# Altium PCB AMS_V3.PcbDoc
Units mm, origin at the board's own origin, x right, y up, seen from the top; angles counter-clockwise.
Board outline 87.6 x 94.8 mm, 2 copper layers (Top Layer, Bottom Layer), stack 1.58 mm thick; 71 components, 43 nets, 266 pads, 10 vias.
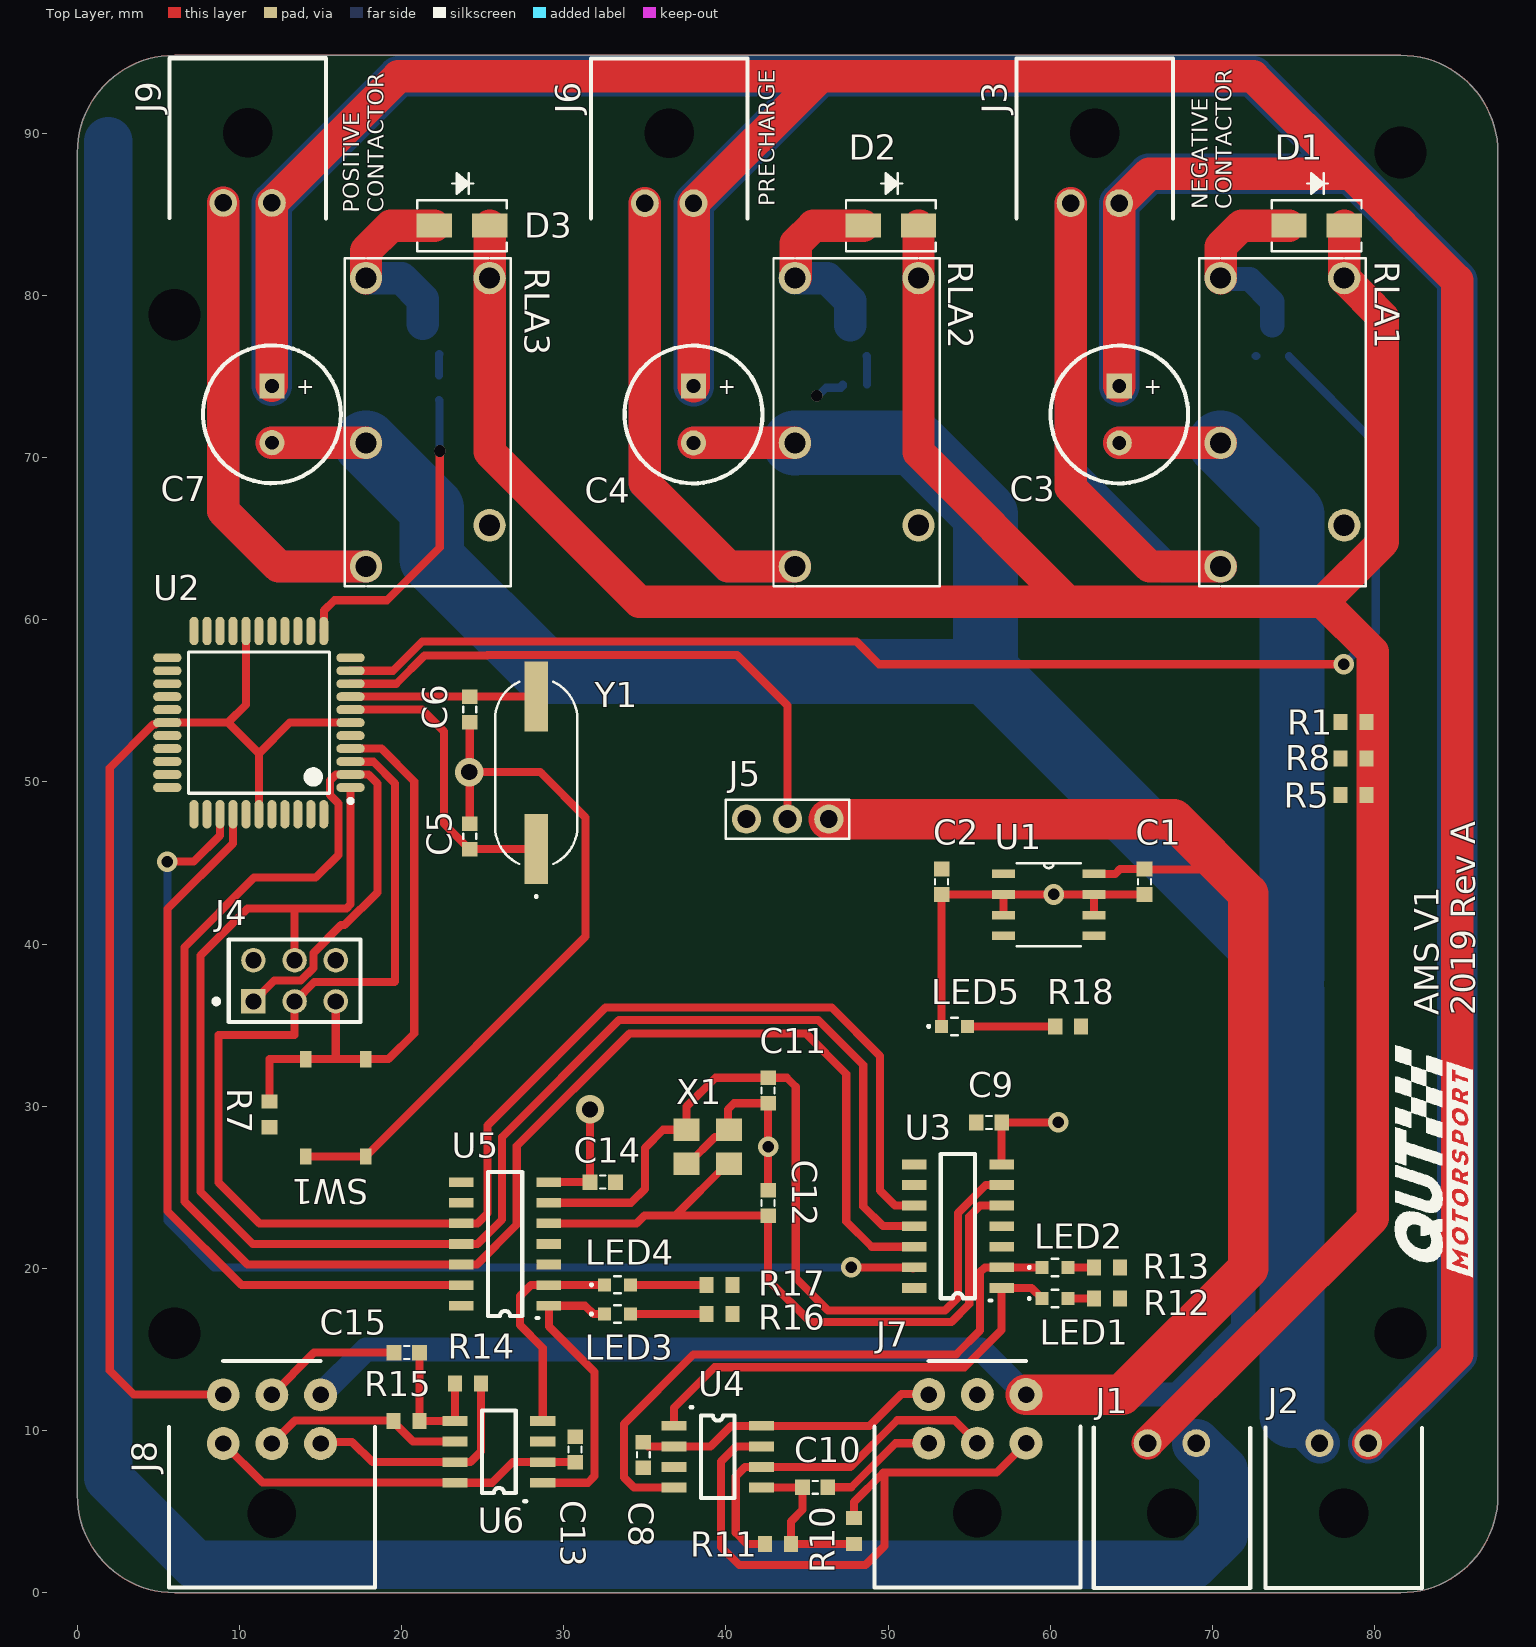
[diagram p0: Top Layer view]
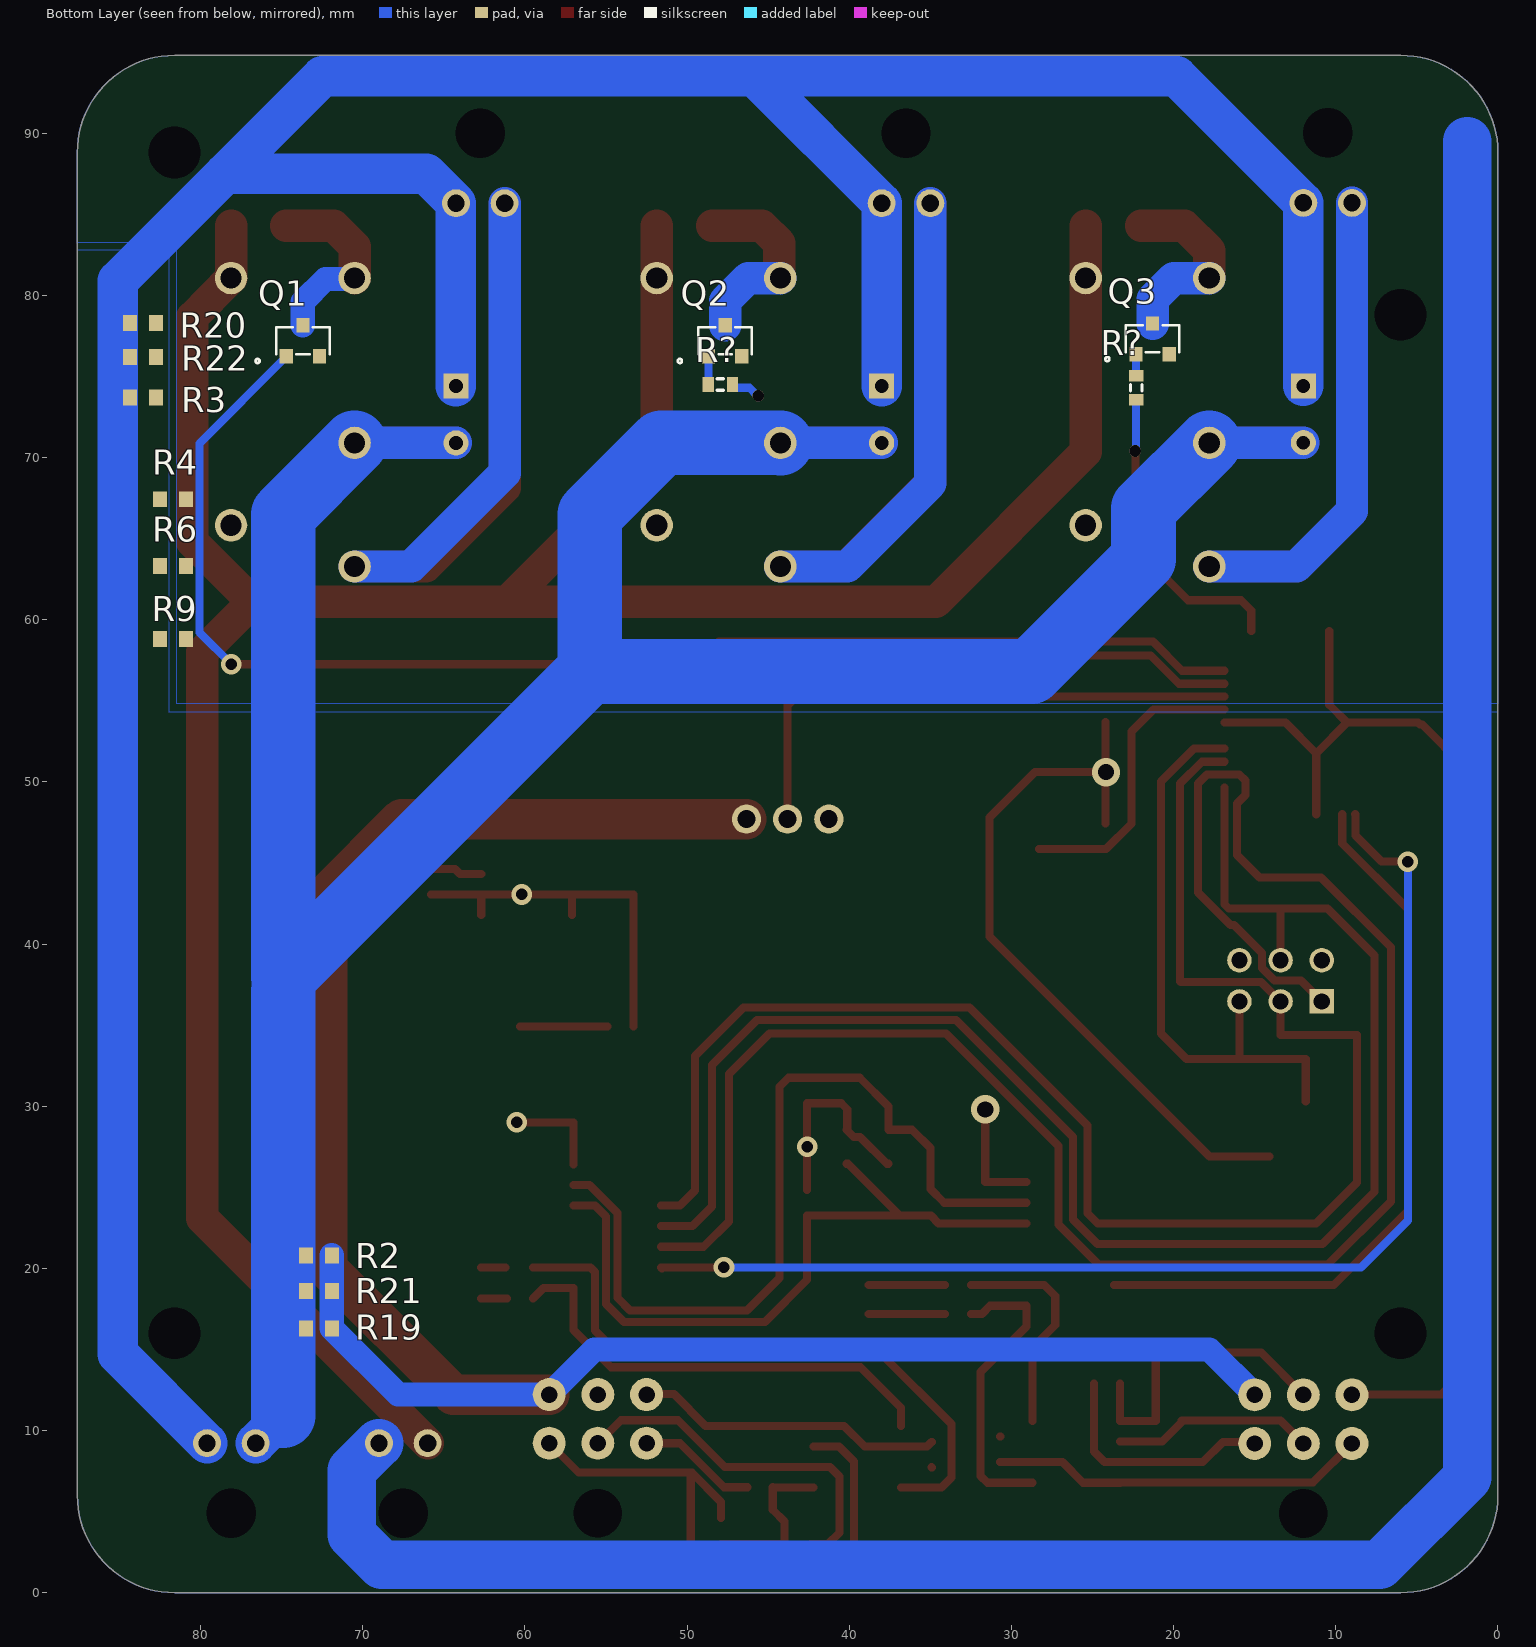
[diagram p1: Bottom Layer view, seen from below]

## Layer stack, top to bottom
Top Solder: solder mask 0.0102, Solder Resist, Dk 3.5
Top Layer: signal copper 0.035
Dielectric 1: dielectric 1.51, FR-4, Dk 4.8
Bottom Layer: signal copper 0.035
Bottom Solder: solder mask 0.0102, Solder Resist, Dk 3.5

## Board outline
0,6 0,88.8 cw(c6,88.8) 6,94.8 81.6,94.8 cw(c81.6,88.8) 87.6,88.8 87.6,6 cw(c81.6,6) 81.6,0 6,0 cw(c6,6)

## Design rules (kind name [scope] priority, off if disabled: settings)
Clearance [All] p1: gap=0.152 ignorepadtopadclearanceinfootprint=FALSE except(0: Arc-Hole Track-Hole SMDPad-Hole THPad-Hole Via-Hole Fill-Hole Poly-Hole Region-Hole Text-Hole)
HoleSize [All] p1: absolutevalues=TRUE maxlimit=5 minlimit=0.15 maxpercent=80.000 minpercent=20.000
HoleToHoleClearance [All] p1: gap=0.152 allowstackedmicrovias=TRUE
MinimumSolderMaskSliver [All] p1: minsoldermaskwidth=0.025
PlaneClearance [All] p1: clearance=0.5
PlaneConnect [All] p1: pad.planeconnectstyle=Direct pad.reliefexpansion=0.508 pad.reliefentries=4 pad.reliefconductorwidth=0.254 pad.reliefairgap=0.254 via.planeconnectstyle=Relief via.reliefexpansion=0.508 via.reliefentries=4 via.reliefconductorwidth=0.254 via.reliefairgap=0.254
PolygonConnect PolygonConnect_7 [All vs IsNamedPolygon('Bottom Layer-No Net')] p1: thpad.connectstyle=Relief thpad.reliefconductorwidth=0.254 thpad.reliefentries=4 thpad.polygonreliefangle="90 Angle" thpad.airgapwidth=0.254 smdpad.connectstyle=Direct smdpad.reliefconductorwidth=0.254 smdpad.reliefentries=4 smdpad.polygonreliefangle="90 Angle" smdpad.airgapwidth=0.254 via.connectstyle=Relief via.reliefconductorwidth=0.254 via.reliefentries=4 via.polygonreliefangle="90 Angle" via.airgapwidth=0.254
PolygonConnect PolygonConnect_6 [All vs IsNamedPolygon('Bottom Layer-No Net')] p2: thpad.connectstyle=Relief thpad.reliefconductorwidth=0.254 thpad.reliefentries=4 thpad.polygonreliefangle="90 Angle" thpad.airgapwidth=0.254 smdpad.connectstyle=Direct smdpad.reliefconductorwidth=0.254 smdpad.reliefentries=4 smdpad.polygonreliefangle="90 Angle" smdpad.airgapwidth=0.254 via.connectstyle=Relief via.reliefconductorwidth=0.254 via.reliefentries=4 via.polygonreliefangle="90 Angle" via.airgapwidth=0.254
PolygonConnect PolygonConnect_5 [All vs IsNamedPolygon('Bottom Layer-No Net')] p3: thpad.connectstyle=Relief thpad.reliefconductorwidth=0.254 thpad.reliefentries=4 thpad.polygonreliefangle="90 Angle" thpad.airgapwidth=0.254 smdpad.connectstyle=Direct smdpad.reliefconductorwidth=0.254 smdpad.reliefentries=4 smdpad.polygonreliefangle="90 Angle" smdpad.airgapwidth=0.254 via.connectstyle=Relief via.reliefconductorwidth=0.254 via.reliefentries=4 via.polygonreliefangle="90 Angle" via.airgapwidth=0.254
PolygonConnect PolygonConnect_4 [All vs IsNamedPolygon('Top Layer-No Net')] p4: thpad.connectstyle=Relief thpad.reliefconductorwidth=0.254 thpad.reliefentries=4 thpad.polygonreliefangle="90 Angle" thpad.airgapwidth=0.254 smdpad.connectstyle=Direct smdpad.reliefconductorwidth=0.254 smdpad.reliefentries=4 smdpad.polygonreliefangle="90 Angle" smdpad.airgapwidth=0.254 via.connectstyle=Relief via.reliefconductorwidth=0.254 via.reliefentries=4 via.polygonreliefangle="90 Angle" via.airgapwidth=0.254
PolygonConnect PolygonConnect_3 [All vs IsNamedPolygon('Top Layer--Safety')] p5: thpad.connectstyle=Relief thpad.reliefconductorwidth=0.254 thpad.reliefentries=4 thpad.polygonreliefangle="90 Angle" thpad.airgapwidth=0.254 smdpad.connectstyle=Direct smdpad.reliefconductorwidth=0.254 smdpad.reliefentries=4 smdpad.polygonreliefangle="90 Angle" smdpad.airgapwidth=0.254 via.connectstyle=Relief via.reliefconductorwidth=0.254 via.reliefentries=4 via.polygonreliefangle="90 Angle" via.airgapwidth=0.254
PolygonConnect PolygonConnect_2 [All vs IsNamedPolygon('Top Layer-+Safety')] p6: thpad.connectstyle=Relief thpad.reliefconductorwidth=0.254 thpad.reliefentries=4 thpad.polygonreliefangle="90 Angle" thpad.airgapwidth=0.254 smdpad.connectstyle=Direct smdpad.reliefconductorwidth=0.254 smdpad.reliefentries=4 smdpad.polygonreliefangle="90 Angle" smdpad.airgapwidth=0.254 via.connectstyle=Relief via.reliefconductorwidth=0.254 via.reliefentries=4 via.polygonreliefangle="90 Angle" via.airgapwidth=0.254
PolygonConnect PolygonConnect_1 [All vs IsNamedPolygon('Top Layer-+Safety')] p7: thpad.connectstyle=Relief thpad.reliefconductorwidth=0.254 thpad.reliefentries=4 thpad.polygonreliefangle="90 Angle" thpad.airgapwidth=0.254 smdpad.connectstyle=Direct smdpad.reliefconductorwidth=0.254 smdpad.reliefentries=4 smdpad.polygonreliefangle="90 Angle" smdpad.airgapwidth=0.254 via.connectstyle=Relief via.reliefconductorwidth=0.254 via.reliefentries=4 via.polygonreliefangle="90 Angle" via.airgapwidth=0.254
PolygonConnect [All] p8: connectstyle=Relief reliefconductorwidth=0.254 reliefentries=4 polygonreliefangle="90 Angle" airgapwidth=0.254
RoomDefinition AMS_V3 [InComponentClass('AMS_V3')] p1: confinementstyle=ConfineIn formatcopy=TRUE lockcomponents=FALSE outline 0,0 87.6,0 87.6,94.8 0,94.8
RoutingVias [All] p1: holewidth=0.711 width=0.3 viastyle="Through Hole" minholewidth=0.5 minwidth=0.15 maxholewidth=4 maxwidth=5
SilkToSolderMaskClearance [IsPad] p1: minsilkscreentomaskgap=0.075 clearancetoexposedcopper=TRUE
SolderMaskExpansion [All] p1: expansion=0.102
Width [All] p1: maxlimit=5 minlimit=0.152 preferedwidth=0.5 minimp=50.000000 maximp=50.000000 favimp=50.000000
24 further rules are at their usual default settings.

## Components (designator, comment, footprint, x,y, rotation, side; value= is the part's Value field where it differs from the comment)
C1 "0.33uF" *CAPC1608X95 65.8,43.839 r270 top
C2 "100nF" *CAPC1608X95 53.3,43.839 r270 top
C3 "ELECTROLYDIC" 8mm_THT 64.25,72.65 r270 top
C4 "ELECTROLYDIC" 8mm_THT 38,72.65 r270 top
C5 "16pF" *CAPC1608X95 24.2,46.637 r90 top
C6 "16pF" *CAPC1608X95 24.2,54.465 r270 top
C7 "ELECTROLYDIC" 8mm_THT 12,72.661 r270 top
C8 "100nF" *CAPC1608X95 34.9,8.5 r90 top
C9 "100nF" *CAPC1608X95 56.215,29 r0 top
C10 "4.7nF" *CAPC1608X95 45.5,6.5 r0 top
C11 "22pF" *CAPC1608X95 42.6,30.965 r270 top
C12 "22pF" *CAPC1608X95 42.6,24.035 r90 top
C13 "100nF" *CAPC1608X95 30.7,8.835 r270 top
C14 "100nF" *CAPC1608X95 32.4,25.315 r180 top
C15 "4.7nF" *CAPC1608X95 20.315,14.8 r180 top
D1 "VS-10MQ100HM35AT" DIODE_SMA 76.418,84.3 r180 top value=Value
D2 "VS-10MQ100HM35AT" DIODE_SMA 50.168,84.3 r180 top value=Value
D3 "VS-10MQ100HM35AT" DIODE_SMA 23.718,84.3 r180 top value=Value
J1 "Microfit 3.0 1x2" Microfit_1X2_R_TH 67.5,4.9 r0 top
J2 "Microfit 3.0 1x2" Microfit_1X2_R_TH 78.1,4.9 r0 top
J3 "Microfit 3.0 1x2" Microfit_1X2_R_TH 62.75,90 r180 top
J4 "826634-3" TE_826634-3 10.86,36.46 r0 top
J5 "1x3" 1x3 46.34,47.7 r180 top
J6 "Microfit 3.0 1x2" Microfit_1X2_R_TH 36.5,90 r180 top
J7 "Microfit 3.0 2x3" Microfit_2X3_R_TH 55.5,4.9 r0 top
J8 "Microfit 3.0 2x3" Microfit_2X3_R_TH 12,4.882 r0 top
J9 "Microfit 3.0 1x2" Microfit_1X2_R_TH 10.5,90.02 r180 top
LED1 "LTST-C191TGKT" LED_LTW-C193TS00 60.3,18.14 r0 top value=Value
LED2 "LTST-C191TGKT" LED_LTW-C193TS00 60.3,20.06 r0 top value=Value
LED3 "LTST-C191TGKT" LED_LTW-C193TS00 33.3,17.185 r0 top value=Value
LED4 "LTST-C191TGKT" LED_LTW-C193TS00 33.3,18.985 r0 top value=Value
LED5 "LTST-C191TGKT" LED_LTW-C193TS00 54.1,34.919 r0 top value=Value
Q1 "MMBT2222A-7-F" SOT-23 73.691,77.2 r180 bottom value=Value
Q2 "MMBT2222A-7-F" SOT-23 47.65,77.2 r180 bottom value=Value
Q3 "MMBT2222A-7-F" SOT-23 21.291,77.315 r180 bottom value=Value
R1 "0R0" RESC1608X55N 78.7,53.7 r0 top
R2 "0R0" RESC1608X55N 72.7,20.8 r0 bottom
R3 "0R0" RESC1608X55N 83.55,73.7 r180 bottom
R4 "0R0" RESC1608X55N 81.7,67.422 r180 bottom
R5 "0R0" RESC1608X55N 78.7,49.2 r0 top
R6 "0R0" RESC1608X55N 81.7,63.3 r180 bottom
R7 "10K" RESC1608X55N 11.852,29.5 r270 top
R8 "0R0" RESC1608X55N 78.7,51.45 r0 top
R9 "0R0" RESC1608X55N 81.7,58.8 r180 bottom
R10 "60R4" RESC1608X55N 47.9,3.8 r90 top
R11 "60R4" RESC1608X55N 43.2,3 r180 top
R12 "330R" RESC1608X55N 63.5,18.14 r180 top
R13 "330R" RESC1608X55N 63.5,20.06 r180 top
R14 "60R4" RESC1608X55N 24.1,12.9 r0 top
R15 "60R4" RESC1608X55N 20.3,10.59 r180 top
R16 "330R" RESC1608X55N 39.6,17.185 r180 top
R17 "330R" RESC1608X55N 39.6,18.975 r180 top
R18 "330R" RESC1608X55N 61.1,34.919 r180 top
R19 "0R0" RESC1608X55N 72.7,16.3 r0 bottom
R20 "0R0" RESC1608X55N 83.55,78.3 r180 bottom
R21 "0R0" RESC1608X55N 72.7,18.6 r0 bottom
R22 "0R0" RESC1608X55N 83.55,76.2 r180 bottom
R? "Res3" J1-0603 47.95,74.5 r0 bottom value=1K
R? "Res3" J1-0603 22.3,74.3 r90 bottom value=1K
RLA1 "ALQ305" ALQ105 78.12,63.28 r0 top value=Value
RLA2 "ALQ305" ALQ105 51.87,63.28 r0 top value=Value
RLA3 "ALQ305" ALQ105 25.42,63.28 r0 top value=Value
SW1 "PTS526 SM15 SMTR2 LFS" PTS526SK15SMTR2LFS 15.94,29.9 r270 top
U1 "L78L05ACD13TR" SOIC127P600X175-8N 59.9,42.419 r0 top
U2 "ATmega1284P-AU" 44A_N 11.2,53.65 r180 top
U3 "MCP2517FD" "MCP2517FD SOIC" 57,18.79 r180 top
U4 "MCP2561" "MCP2561 SOIC" 36.798,10.29 r0 top
U5 "MCP2517FD" "MCP2517FD SOIC" 29.075,17.695 r180 top
U6 "MCP2561" "MCP2561 SOIC" 28.7,6.78 r180 top
X1 "ABM8G-20.000MHZ-18-D2Y-T" "XTAL 3.2x2.5mm" 38.875,27.5 r180 top
Y1 "28MHZ" ABLS_Series 28.3,50.551 r90 top value=Value

## Footprints (in the part's own frame and the unit in brackets; to place one, negate y for a bottom-side part, rotate by r counter-clockwise, add the part's x,y. Pads: shape width x height; smd on the part's side, far side on the other; paste and mask are expansions set on the pad)
1x3 [mm]
  round 1.8 hole 1.1 mask+0: 1(0,0) 2(2.54,0) 3(5.08,0)
  silkscreen extent -1.27,-1.2 6.35,1.2, body extent -1.27,-1.2 6.35,1.2, height 8.38
8mm_THT [mm]
  rect 1.55x1.55 hole 0.85: 1(-1.75,0)
  round 1.55 hole 0.85: 2(1.75,0)
  silkscreen extent -4.25,-4.25 4.25,4.25, body extent -4,-4 4,4, height 11.5
44A_N [mm] "Thin QFP, 44-Leads, Body 10x10mm, Pitch 0.8mm, IPC Medium Density"
  oval 1.75x0.55 smd: 1(-5.65,4) 2(-5.65,3.2) 3(-5.65,2.4) 4(-5.65,1.6) 5(-5.65,0.8) 6(-5.65,0) 7(-5.65,-0.8) 8(-5.65,-1.6) 9(-5.65,-2.4) 10(-5.65,-3.2) 11(-5.65,-4) 23(5.65,-4) 24(5.65,-3.2) 25(5.65,-2.4) 26(5.65,-1.6) 27(5.65,-0.8) 28(5.65,0) 29(5.65,0.8) 30(5.65,1.6) 31(5.65,2.4) 32(5.65,3.2) 33(5.65,4)
  oval 0.55x1.75 smd: 12(-4,-5.65) 13(-3.2,-5.65) 14(-2.4,-5.65) 15(-1.6,-5.65) 16(-0.8,-5.65) 17(0,-5.65) 18(0.8,-5.65) 19(1.6,-5.65) 20(2.4,-5.65) 21(3.2,-5.65) 22(4,-5.65) 34(4,5.65) 35(3.2,5.65) 36(2.4,5.65) 37(1.6,5.65) 38(0.8,5.65) 39(0,5.65) 40(-0.8,5.65) 41(-1.6,5.65) 42(-2.4,5.65) 43(-3.2,5.65) 44(-4,5.65)
  silkscreen extent -5.77,-4.35 4.35,4.95, body extent -5,-5 5,5, height 1.2
*CAPC1608X95 [mm]
  rect 0.9x0.97 smd: 1(-0.785,0) 2(0.785,0)
  silkscreen extent -0.18,-0.4 0.18,0.4, body extent -0.8,-0.4 0.8,0.4, height 0.8
ABLS_Series [mil]
  rect 170x56 smd paste+0 mask+0: 1(-185,0) 2(185,0)
  silkscreen extent -303,-100 221,100, body extent -225,-100 225,100, height 165
ALQ105 [mm]
  round 2 hole 1.3 mask+0: 1(-7.62,17.78) 2(0,17.78) 3(-7.62,7.62) 4(-7.62,0) 5(0,2.54)
  silkscreen extent -8.94,-1.23 1.32,19.01, body extent -8.81,-1.1 1.19,18.88, height 15.6
DIODE_SMA [mil]
  rect 86x58 smd paste+0 mask+0: 1(-67,0) 2(67,0)
  silkscreen extent -109,-127 109,62, body extent -89,-55 89,55, height 90
J1-0603 [mm] "Chip Resistor, Body 1.6x0.8mm, IPC High Density"
  rect 0.7x0.9 smd: 1(-0.75,0) 2(0.75,0)
  silkscreen extent -0.2,-0.35 0.2,0.35, body extent -0.85,-0.48 0.85,0.48, height 0.9
LED_LTW-C193TS00 [mm]
  rect 0.8x0.8 smd paste+0 mask+0: 1(-0.8,0) 2(0.8,0)
  silkscreen extent -1.68,-0.53 0.2,0.53, body extent -0.85,-0.45 0.85,0.45, height 0.8
"MCP2517FD SOIC" [mm]
  rect 1.5x0.6 smd: 1(0,0) 2(0,-1.27) 3(0,-2.54) 4(0,-3.81) 5(0,-5.08) 6(0,-6.35) 7(0,-7.62) 8(5.4,-7.62) 9(5.4,-6.35) 10(5.4,-5.08) 11(5.4,-3.81) 12(5.4,-2.54) 13(5.4,-1.27) 14(5.4,0)
  silkscreen extent 0.63,-8.26 3.76,0.76, body extent 0.74,-8.13 4.64,0.52, height 1.74
"MCP2561 SOIC" [mm]
  rect 1.55x0.6 smd: 1(0,0) 2(0,-1.27) 3(0,-2.54) 4(0,-3.81) 5(5.4,-3.81) 6(5.4,-2.54) 7(5.4,-1.27) 8(5.4,0)
  silkscreen extent 1.02,-4.44 3.74,1.14, body extent 0.51,-4.38 4.64,0.52, height 1.65
Microfit_1X2_R_TH [mm]
  round 1.72 hole 1.07: 1(1.5,4.32) 2(-1.5,4.32)
  round 1.524 hole 3.05: ""(0,0)
  silkscreen extent -4.82,-4.6 4.82,5.28, body extent -4.82,-4.6 4.83,5.3, height 5.64
Microfit_2X3_R_TH [mil]
  round 80 hole 40: 1(118.11,170) 2(0,170) 3(-118.11,170) 4(118.11,288.19) 5(0,288.19) 6(-118.11,288.19)
  round 0 hole 118.11 mask+10: NC(0,0)
  silkscreen extent -250,-180 250,370, body extent -259,-181 259,301, height 348
PTS526SK15SMTR2LFS [mm]
  rect 1x0.7 smd: 1(-3,1.85) 2(3,1.85) 3(-3,-1.85) 4(3,-1.85)
  body extent -3.2,-2.55 3.2,2.55, height 1.5
RESC1608X55N [mm]
  rect 0.87x0.98 smd: 1(-0.8,0) 2(0.8,0)
  body extent -0.8,-0.4 0.8,0.4, height 0.45
SOIC127P600X175-8N [mil]
  rect 56x21 smd: 1(-110,75) 2(-110,25) 3(-110,-25) 4(-110,-75) 5(110,-75) 6(110,-25) 7(110,25) 8(110,75)
  silkscreen extent -78,-101 78,101, body extent -77,-96 77,96, height 69
SOT-23 [mil]
  rect 32x35 smd paste+0 mask+0: 1(-40.35,-37.2) 2(40.35,-37.2) 3(0,37.2)
  silkscreen extent -115,-54 65,33, body extent -60,-28 60,28, height 43
TE_826634-3 [mm]
  rect 1.508x1.508 hole 1: 1(0,0)
  round 1.508 hole 1: 2(0,2.54) 3(2.54,0) 4(2.54,2.54) 5(5.08,0) 6(5.08,2.54)
  silkscreen extent -2.44,-1.27 6.6,3.81, body extent -1.52,-1.27 6.6,3.81, height 8
"XTAL 3.2x2.5mm" [mm]
  rect 1.6x1.4 smd: 1(-1.3,-1.05) 2(1.3,-1.05) 3(1.3,1.05) 4(-1.3,1.05)
  body extent -1.6,-1.25 1.6,1.25, height 1

## Part data
C1 C2 C5 C6 C8 C9 C10 C11 C12 C13 C14 C15: library part CGJ3E3X7R1E334K080AB, "Cap Ceramic 0.33uF 25V X7R 10% SMD 0603 125°C Punched Paper T/R", Package="0603 TDK", Digi-Key_Part_Number=445-13347-1-ND, Digi-Key_Purchase_URL=https://www.digikey.com.au/product-detail/en/tdk-corporation/CGJ3E3X7R1E334K080AB/445-13347-1-ND/3955013?utm_source=snapeda&utm_medium=aggregator&utm_campaign=symbol, MF=TDK, MP=CGJ3E3X7R1E334K080AB, SnapEDA_Link=https://www.snapeda.com/parts/CGJ3E3X7R1E334K080AB/TDK-Lambda%20Americas%20Inc/view-part/?ref=snap
D1 D2 D3: "No Description Available", Manufacturer_Part_Number=VS-10MQ100NPBF, Built_By=EMA_UL_Team, Copyright="Copyright (C) 2018 Accelerated Designs. All rights reserved", RefDes=RefDes, Type=DEV, Vendor=Vishay
J1 J2 J3 J6 J9: library part Microfit_1x2
J4: "Conn Unshrouded Header HDR 6 POS 2.54mm Solder RA Thru-Hole Automotive Carton", Package=None, Availability=Unavailable, EU_RoHS_Compliance=Compliant, MF="TE Connectivity", MP=826634-3, Price=None, SnapEDA_Link=https://www.snapeda.com/parts/826634-3/TE%20Connectivity%20AMP%20Connectors/view-part/?ref=snap, TE_purchase_URL=https://www.te.com/usa-en/product-826634-3.html?te_bu=Cor&te_type=disp&te_campaign=seda_glo_cor-seda-global-disp-prtnr-fy19-seda-model-bom-cta_sma-317_1&elqCampaignId=32493
J7 J8: library part Microfit_2x3
LED1 LED2 LED3 LED4 LED5 Q1 Q2 Q3 RLA1 RLA2 RLA3: "No Description Available", RefDes=RefDes, Type=DEV
  LED1 LED2 LED3 LED4 LED5: Built_By=EMA_Justin, Copyright="Copyright (C) 2016 Accelerated Designs. All rights reserved", Manufacturer_Part_Number=LTST-C191TGKT, Vendor=Lite-On
  Q1 Q2 Q3: Built_By=EMA_UL_Team, Copyright="Copyright (C) 2018 Accelerated Designs. All rights reserved", Manufacturer_Part_Number=MMBT2222A-7-F, Vendor="Diodes Inc"
  RLA1 RLA2 RLA3: Built_By=EMA_UL_Team, Copyright="Copyright (C) 2018 Accelerated Designs. All rights reserved", Manufacturer_Part_Number=ALQ305, Vendor=Panasonic
R1 R2 R3 R4 R5 R6 R8 R9 R10 R11 R12 R13 R14 R15 R16 R17 R18 R19 R20 R21 R22: library part 10K, "Res Thick Film 0603 10K Ohm 5% 0.25W_1/4W_ ±200ppm/C Molded SMD Automotive T/R", Package="0603 Rohm", Availability=Unavailable, MF=Rohm, MP=ESR03EZPJ103, Price=None, SnapEDA_Link=https://www.snapeda.com/parts/ESR03EZPJ103/Rohm/view-part/?ref=snap
R7: "Res Thick Film 0603 10K Ohm 5% 0.25W_1/4W_ ±200ppm/C Molded SMD Automotive T/R", Package="0603 Rohm", Availability=Unavailable, MF=Rohm, MP=ESR03EZPJ103, Price=None, SnapEDA_Link=https://www.snapeda.com/parts/ESR03EZPJ103/Rohm/view-part/?ref=snap
R? R?: "Resistor", LatestRevisionDate=29-May-2009, LatestRevisionNote="IPC-7351 Footprint Added.", PackageDescription="Chip Resistor", PackageReference=J1-0603, Published=8-Jun-2000, Publisher="Altium Limited"
SW1: "TACT 5.2 X 5.2, 1.5 MM H, 160GF, / SPST-NO Top Actuated Surface Mount"
U1: "L78L Series 20 V 100 mA Surface Mount Positive Voltage Regulator - SOIC-8", Package="SOIC-8 STMicroelectronics", Availability=Unavailable, MF=STMicroelectronics, MP=L78L05ACD13TR, Price=None, SnapEDA_Link=https://www.snapeda.com/parts/L78L05ACD13TR/STMicroelectronics/view-part/?ref=snap
U2: library part CMP-0107-00053-1, "20 MHz 8-bit AVR Microcontroller with 128KB Flash, 44-Pin TQFP Pkg, Industrial Temp", DatasheetVersion="revD, Nov-2009", PackageDescription="44-Pin Plastic Thin Profile Quad Flat Pack, 10 x 10 x 1.0 mm Body, 0.8 mm Pitch (TQFP)", PackageReference=44A, PackageVersion="rev.B, Oct-2001"
X1: library part "Crystal 20Mhz 3.2x2.5mm", "20MHz ±20ppm Crystal 18pF 80 Ohms 4-SMD, No Lead", ComponentLink1Description=Digikey, ComponentLink1URL=https://www.digikey.com.au/product-detail/en/abracon-llc/ABM8G-20.000MHZ-18-D2Y-T/535-10271-1-ND/2218084, ComponentLink2Description=Datasheet, ComponentLink2URL=https://abracon.com/Resonators/ABM8G.pdf, ComponentLink3Description=Drawing, ComponentLink3URL=https://abracon.com/Support/PackageDrawing/Resonators/ABM8G.PDF
Y1: library part ABLS-28.63636MHZ, "No Description Available", Manufacturer_Part_Number=ABLS-28.63636MHZ-CL-RESR-A-1-G-F, Built_By=EMA_UL_Team, Copyright="Copyright (C) 2018 Accelerated Designs. All rights reserved", RefDes=RefDes, Type=DEV, Vendor=Abracon

## Free pads (board coordinates)
  round 3 hole 3.2 unplated: 2(81.6,88.8) 3(6,78.8) 5(6,16) 6(81.6,16)

## Via types
v1: diameter 1.27, hole 0.711, Top Layer to Bottom Layer, 6 vias
v2: diameter 0.711, hole 0.711, Top Layer to Bottom Layer, 2 vias
v3: diameter 1.75, hole 1, Top Layer to Bottom Layer, 2 vias

## Nets (pads, with @x,y where several pads share a name; then routed paths per layer and width w, separated by ;. In a path a pad name is that pad's centre, name@x,y a point inside that pad or via, vN(x,y) a via of type N, cw(c..) or ccw(c..) an arc to the next point about the centre after c; other vN are vias at no path point)
+5V: C2.1 C8.1 C9.1 C13.1 C14.1 J4.2 R1.1 R5.1 R7.2 R8.1 R12.1 R13.1 R16.1 R17.1 R18.1 U1.1 U2.5 U2.17 U2.38 U3.14 U4.3 U5.14 U6.3 | length 0.1
  Top Layer w0.5: C13.1@30.665,9.62 C13.1 ; C8.1 C8.1@34.917,7.733
+12V: C1.1 J5.1 J7.4 J8.4 R2.1 R19.1 R21.1 U1.8 | length 141.3
  Top Layer w0.5: U1.8 64,44.324 64.3,44.624 C1.1 65.824,44.6 70.647,44.6
  Top Layer w2.5: J5.1 67.6,47.7 72.2,43.1 72.2,20 64.42,12.22 J7.4
  Bottom Layer w1.5: J8.4 17.798,15 55.72,15 J7.4 67.82,12.22 R19.1 R21.1 R2.1
+Safety: C3.2 C4.2 C7.2 J2.2 R2.2 R19.2 R21.2 RLA1.3 RLA2.3 RLA3.3 | length 195.7
  Top Layer w2: C7.2@12,70.9 RLA3.3 ; C4.2 RLA2.3 ; C3.2 RLA1.3
  Bottom Layer w2: C7.2@12,70.9 RLA3.3 ; C4.2 RLA2.3 ; C3.2 RLA1.3
  Bottom Layer w2.5: 74.9,10.92 J2.2
  Bottom Layer w4: RLA3.3 21.852,66.848 21.852,63.748 28.8,56.8 56,56.8 ; RLA2.3 44.259,70.909 51.591,70.909 56,66.5 56,56.873 74.9,37.973 74.9,66.5 RLA1.3 ; 74.9,10.92 74.9,37.1
-Safety: C3.1 C4.1 C7.1 J2.1 J3.2 J6.2 J9.2 R3.1 R20.1 R22.1 | length 430.7
  Top Layer w2: C7.1 J9.2 19.8,93.5 45.82,93.5 ; C4.1 J6.2 45.82,93.5 ; C3.1 J3.2 64.28,85.68 66.1,87.5 78.5,87.5 ; J2.1 85.08,14.7 85.08,80.92 78.5,87.5 ; 45.82,93.5 72.5,93.5 78.5,87.5
  Bottom Layer w2.5: C7.1 J9.2 19.8,93.5 45.72,93.5 72.5,93.5 78.5,87.5 ; C4.1 J6.2 45.72,93.4 ; C3.1 J3.2 64.256,85.68 66.076,87.5 78.5,87.5 ; J2.1 85.1,14.72 85.1,73.6 85.1,76 85.1,78.4 85.1,80.9 78.5,87.5
CAN_OSC1: C11.1 U3.6 U5.6 X1.2 | length 52.6
  Top Layer w0.5: U5.6 34.145,24.045 35,24.9 35,27.427 36.123,28.55 X1.2 37.575,29.975 39.35,31.75 C11.1 43.75,31.75 44.3,31.2 44.3,19.4 46.3,17.4 53.51,17.4 54.3,18.19 54.3,23.423 56.017,25.14 U3.6
CAN_OSC2: C12.1 U3.5 U5.5 X1.4 | length 43.9
  Top Layer w0.5: U5.5 34.492,22.775 34.967,23.25 C12.1 42.6,19.3 45.2,16.7 53.9,16.7 55,17.8 55,23.2 55.67,23.87 U3.5 ; 36.888,23.262 40.075,26.45 X1.4
FanControl: J5.2 U2.9 | length 36
  Top Layer w0.5: U2.9 19.669,56.05 21.407,57.788 25.281,57.788 25.304,57.811 40.689,57.811 43.8,54.7 J5.2
GLV_12V: D1.1 D2.1 D3.1 J1.2 R1.2 R5.2 R8.2 RLA1.2 RLA2.2 RLA3.2 | length 181.2
  Top Layer w2: D3.1 RLA3.2 25.42,70.343 34.663,61.1 61.1,61.1 ; D2.1 RLA2.2 51.87,70.33 61.1,61.1 ; J1.2 79.887,23.087 ; D1.1 RLA1.2 80.5,78.647 80.5,64.8 76.8,61.1 ; 79.6,22.8 79.887,23.087 ; 61.1,61.1 76.8,61.1 ; 76.8,61.1 79.887,58.013 79.887,23.087
GLV_GND: J1.1 Q1.2 Q2.2 Q3.2 R4.2 R6.2 R9.2 | length 160.5
  Bottom Layer w0.5: Q1.2 Q1.2@72.7,76.255
  Bottom Layer w3: 1.9,89.5 1.9,7.1 7.277,1.723 68.816,1.723 70.677,3.584 70.677,7.543 J1.1
GND: C1.2 C2.2 C5.2 C6.2 C8.2 C9.2 C10.2 C11.2 C12.2 C13.2 C14.2 C15.2 J4.6 J5.3 J7.3 J7.5 J7.6 J8.3 J8.5 J8.6 LED5.1 R3.2 R4.1 R6.1 R9.1 R20.2 R22.2 SW1.2 SW1.4 U1.2 U1.3 U1.6 U1.7 U2.6 U2.18 U2.28 U2.39 U3.7 U4.2 U4.8 U5.7 U6.2 U6.8 X1.1 X1.3 | length 224.6
  Top Layer w0.5: J8.3@9.08,9.2 J8.3 11.416,6.784 23.296,6.784 U6.8 25.58,6.78 26.85,8.05 U6.2 C13.2 ; J8.6@9.3,12.22 3.48,12.22 2,13.7 2,50.858 4.669,53.527 4.814,53.527 4.936,53.65 U2.28 9.3,53.65 ; U2.18 10.4,54.75 9.3,53.65 ; U2.39 11.2,51.75 ; J8.5 14.598,14.8 C15.2 ; SW1.4 SW1.2 31.347,40.457 31.347,47.8 28.612,50.535 28.547,50.6 v3@24.2,50.6 ; U2.6 13.1,53.65 11.2,51.75 ; C5.2 v3@24.2,50.6 ; C6.2 v3@24.2,50.6 ; U5.7 C14.2 v3(31.615,29.8) ; C8.2 34.935,9.285 35.2,9.02 U4.2 39.045,9.02 40.315,10.29 U4.8 48.854,10.29 50.814,12.251 52.469,12.251 J7.6 ; X1.3 37.675,26.45 39.325,28.1 39.725,28.1 X1.1 40.122,28.603 40.122,29.807 40.495,30.18 C11.2 v1(42.6,27.5) C12.2 ; C10.2 47.725,6.5 50.443,9.218 J7.3 ; LED5.1 C2.2 U1.2 ; U3.7 C9.2 v1(60.5,29) ; U1.3 U1.2 ; U1.6 U1.7 ; C1.2 U1.7 ; 9.3,53.65 11.2,51.75 ; U1.2 U1.7
  other v1: 60.2,43.054
  other v3: 24.165,50.6
MISO: J4.1 U2.2 U3.12 U5.12 | length 119.4
  Top Layer w0.5: J4.1 12.143,37.743 13.778,37.743 14.556,38.521 14.556,39.456 16.265,41.165 16.488,41.165 18.5,43.177 18.5,49.9 17.95,50.45 U2.2 15.95,50.45 15.573,50.073 15.573,49.185 16.1,48.658 16.1,45.5 14.7,44.1 10.9,44.1 6.6,39.8 6.6,24.13 10.495,20.235 U5.12 24.635,20.235 27.1,22.7 27.1,27.535 34.04,34.475 44.925,34.475 47.415,31.985 47.415,22.9 48.985,21.33 U3.12
MOSI: J4.4 U2.1 U3.11 U5.11 | length 99.9
  Top Layer w0.5: J4.4 13.4,42.2 ; U2.1 16.85,42.45 16.6,42.2 13.4,42.2 ; U3.11 49.675,22.6 48.466,23.809 48.466,32.534 45.69,35.31 33.41,35.31 26.2,28.1 26.2,23.02 24.685,21.505 U5.11 10.818,21.505 7.6,24.723 7.6,39.3 10.5,42.2 13.4,42.2
NetC5_1: C5.1 U2.7 Y1.1 | length 18.3
  Top Layer w0.5: U2.7 21.25,54.45 22.6,53.1 22.6,47.417 24.165,45.852 C5.1 Y1.1
NetC6_1: C6.1 U2.8 Y1.2 | length 11.4
  Top Layer w0.5: U2.8 C6.1 Y1.2
NetC10_1: C10.1 R10.1 R11.1 U4.5 | length 10.2
  Top Layer w0.5: U4.5 42.208,6.49 44.705,6.49 C10.1 44.715,5.115 44,4.4 R11.1 R10.1
NetC15_1: C15.1 R14.1 R15.1 U6.5 | length 8.7
  Top Layer w0.5: C15.1 R15.1 U6.5 R14.1
NetD1_2: D1.2 Q1.3 RLA1.1 | length 12
  Top Layer w2: RLA1.1 70.5,83 71.8,84.3 D1.2
  Bottom Layer w1.5: RLA1.1 70.558,81.002 72.298,81.002 73.691,79.609 Q1.3
NetD2_2: D2.2 Q2.3 RLA2.1 | length 12.3
  Top Layer w1.5: RLA2.1 RLA2.1@44.308,81.118 ; D2.2@48.453,84.287 D2.2
  Top Layer w2: RLA2.1@44.308,81.118 44.308,83.208 45.387,84.287 D2.2@48.453,84.287
  Bottom Layer w2: RLA2.1 46.24,81.06 47.65,79.65 Q2.3
NetD3_2: D3.2 Q3.3 RLA3.1 | length 12.1
  Top Layer w1.5: D3.2@22.003,84.287 D3.2
  Top Layer w2: RLA3.1 17.8,82.76 19.327,84.287 D3.2@22.003,84.287
  Bottom Layer w2: RLA3.1 19.99,81.06 21.291,79.759 Q3.3
NetJ3_1: J3.1 RLA1.4 | length 57.1
  Top Layer w2: J3.1 61.25,68.15 66.12,63.28 RLA1.4
  Bottom Layer w2: J3.1 61.25,69.046 67.016,63.28 RLA1.4
NetJ6_1: J6.1 RLA2.4 | length 57.3
  Top Layer w2: J6.1 35,68.43 40.15,63.28 RLA2.4
  Bottom Layer w2: J6.1 35,68.4 40.12,63.28 RLA2.4
NetJ7_1: J7.1 R10.2 U4.7 | length 36.8
  Top Layer w0.5: U4.7 40.62,9.02 39.7,8.1 39.7,2.82 40.82,1.7 48.6,1.7 49.775,2.875 49.775,7.325 49.7,7.4 ; R10.2 47.9,5.6 49.7,7.4 ; J7.1 56.682,7.4 49.7,7.4
NetJ7_2: J7.2 R11.2 U4.6 | length 22.5
  Top Layer w0.5: R11.2 41.3,3 40.6,3.7 40.6,7.175 41.175,7.75 U4.6 47.675,7.75 50.561,10.636 54.082,10.636 J7.2
NetJ8_1: J8.1 R14.2 U6.7 | length 14.9
  Top Layer w0.5: J8.1 15.1,9.3 16.95,9.3 18.2,8.05 U6.7 24.25,8.05 24.9,8.7 R14.2
NetJ8_2: J8.2 R15.2 U6.6 | length 12.5
  Top Layer w0.5: J8.2 13.418,10.618 19.5,10.618 R15.2 19.5,10.535 20.7,9.335 20.7,9.32 U6.6
NetJ9_1: J9.1 RLA3.4 | length 58.4
  Top Layer w2: J9.1 9,66.7 12.42,63.28 RLA3.4
  Bottom Layer w2: J9.1 9,66.7 12.42,63.28 RLA3.4
NetLED1_1: LED1.1 U3.1 U4.1 | length 28.7
  Top Layer w0.5: U4.1 36.803,10.295 36.803,11.403 39.3,13.9 54.7,13.9 57,16.2 U3.1 58.85,18.79 LED1.1
NetLED1_2: LED1.2 R12.2 | length 1.6
  Top Layer w0.5: LED1.2 R12.2
NetLED2_1: LED2.1 U3.2 U4.4 | length 38.6
  Top Layer w0.5: U4.4@36.803,6.475 U4.4 34.32,6.48 33.7,7.1 33.7,10.4 38,14.7 54.2,14.7 55.67,16.17 55.67,19.765 55.965,20.06 U3.2 LED2.1
NetLED2_2: LED2.2 R13.2 | length 1.5
  Top Layer w0.5: LED2.2@61.2,20.06 R13.2
NetLED3_1: LED3.1 U5.1 U6.1 | length 18.7
  Top Layer w0.5: U6.1 31.48,6.78 31.9,7.2 31.9,13.6 29.075,16.425 U5.1 31.315,17.695 31.825,17.185 LED3.1
NetLED3_2: LED3.2 R16.2 | length 4.7
  Top Layer w0.5: LED3.2 R16.2
NetLED4_1: LED4.1 U5.2 U6.4 | length 13.8
  Top Layer w0.5: U6.4 28.7,15.1 27.3,16.5 27.3,18.3 27.975,18.975 LED4.1@32.49,18.975
NetLED4_2: LED4.2 R17.2 | length 4.7
  Top Layer w0.5: LED4.2@34.105,18.98 R17.2@38.795,18.98
NetLED5_2: LED5.2 R18.2 | length 5.4
  Top Layer w0.5: LED5.2 R18.2
NetQ1_1: Q1.1 U2.10 | length 84.6
  Top Layer w0.5: U2.10 19.473,56.85 21.27,58.648 48.046,58.648 49.44,57.253 v1(78.1,57.253)
  Bottom Layer w0.5: Q1.1 74.716,76.217 80.063,70.871 80.063,59.216 v1(78.1,57.253)
NetQ2_1: Q2.1 R?.2@48.7,74.5 | length 1.8
  Bottom Layer w0.5: Q2.1 48.687,76.243 48.687,74.513 R?.2@48.7,74.5
NetQ3_1: Q3.1 R?.2@22.3,75.05 | length 1.3
  Bottom Layer w0.5: R?.2@22.3,75.05 22.308,75.058 22.308,76.362 Q3.1
NetR?_1: R?.1@22.3,73.55 U2.12 | length 19.1
  Top Layer w0.5: U2.12 15.21,59.31 15.21,60.56 15.85,61.2 19.1,61.2 22.35,64.45 v2(22.35,70.4)
  Bottom Layer w0.5: R?.1@22.3,73.55 22.325,73.525 22.325,70.425 v2(22.35,70.4)
NetU2_36: U2.36 U3.13 | length 74.6
  Top Layer w0.5: v1(5.55,45.081) 7.181,45.081 8.79,46.69 8.79,47.99 U2.36 ; v1(47.725,20.06) 51.48,20.06 51.54,20 U3.13
  Bottom Layer w0.5: v1(5.55,45.081) 5.55,22.95 8.44,20.06 v1(47.725,20.06)
NetU2_37: U2.37 U5.13 | length 46.2
  Top Layer w0.5: U2.37 9.6,46.2 5.55,42.15 5.55,23.541 10.126,18.965 U5.13
RESET: J4.5 R7.1 SW1.1 SW1.3 U2.4 | length 36.1
  Top Layer w0.5: R7.1 11.852,32.9 SW1.3 15.9,32.9 ; J4.5 15.94,32.94 15.9,32.9 ; U2.4 18.75,52.05 20.775,50.025 20.775,34.475 19.2,32.9 SW1.1 15.9,32.9
SCK: J4.3 U2.3 U3.10 U5.10 | length 100.6
  Top Layer w0.5: U2.3 16.86,51.24 18.26,51.24 19.6,49.9 19.6,37.7 19.55,37.65 14.608,37.65 13.418,36.46 J4.3 13.4,34.4 8.7,34.4 8.7,25.3 11.225,22.775 U5.10 24.675,22.775 25.3,23.4 25.3,28.8 32.581,36.081 46.519,36.081 49.5,33.1 49.5,24.8 50.43,23.87 U3.10
pads on no net: J1. J2. J3. J6. J7.NC J8.NC J9. R?.1@47.2,74.5 RLA1.5 RLA2.5 RLA3.5 U1.4 U1.5 U2.11 U2.13 U2.14 U2.15 U2.16 U2.19 U2.20 U2.21 U2.22 U2.23 U2.24 U2.25 U2.26 U2.27 U2.29 U2.30 U2.31 U2.32 U2.33 U2.34 U2.35 U2.40 U2.41 U2.42 U2.43 U2.44 U3.3 U3.4 U3.8 U3.9 U5.3 U5.4 U5.8 U5.9
copper on no net: | length 1.9
  Bottom Layer w0.5: v2(45.6,73.8) 45.657,73.8 46.157,74.3 47.1,74.3 47.2,74.4 47.2,74.5

## Polygon pours and split planes (outlines as drawn)
GND on Bottom Layer "Bottom Layer-No Net" (solid, shelved, pour order 23): 0,54.3 81.929,54.3 81.929,82.771 87.542,82.771 87.6,82.779 87.6,6 cw(c81.6,6) 81.6,0 6,0 cw(c6,6) 0,6
GLV_GND on Bottom Layer "Bottom Layer-No Net" (solid, shelved, pour order 22): 0,88.8 0,54.8 81.471,54.8 81.471,83 81.7,83.229 87.542,83.229 87.6,83.221 87.6,88.8 ccw(c81.6,88.8) 81.6,94.8 6,94.8 ccw(c6,88.8)
+5V on Top Layer "Top Layer-No Net" (solid, shelved, pour order 21): 81.6,94.8 6,94.8 ccw(c6,88.8) 0,88.8 0,6 ccw(c6,6) 6,0 81.6,0 ccw(c81.6,6) 87.6,6 87.6,88.8 ccw(c81.6,88.8)

## Silkscreen, mask and mechanical layers (free items; w line width, h text height)
Top Overlay:
  drawing of 1456 lines, arcs and shapes, not listed
  text "PRECHARGE" at 43,85.5 h1 r90
  text "NEGATIVE / CONTACTOR" at 71.2,85.3 h1 r90
  text "POSITIVE / CONTACTOR" at 18.9,85.1 h1 r90
  text "AMS V1 / 2019 Rev A" at 86.2,35.6 h1.5 r90
Mechanical 1:
  the board outline again, w0.254

## Text inside footprints (layer, text, board x,y; h text height)
C3: Top Overlay "+" at 65.75,73.9 h1
C4: Top Overlay "+" at 39.5,73.9 h1
C7: Top Overlay "+" at 13.5,73.911 h1